# Altium PCB crowbar.PcbDoc
Units mil, origin at the board's own origin, x right, y up, seen from the top; angles counter-clockwise.
Board outline 2125.98 x 1417.32 mil, 2 copper layers (Top Layer, Bottom Layer); 13 components, 7 nets, 25 pads, 0 vias.
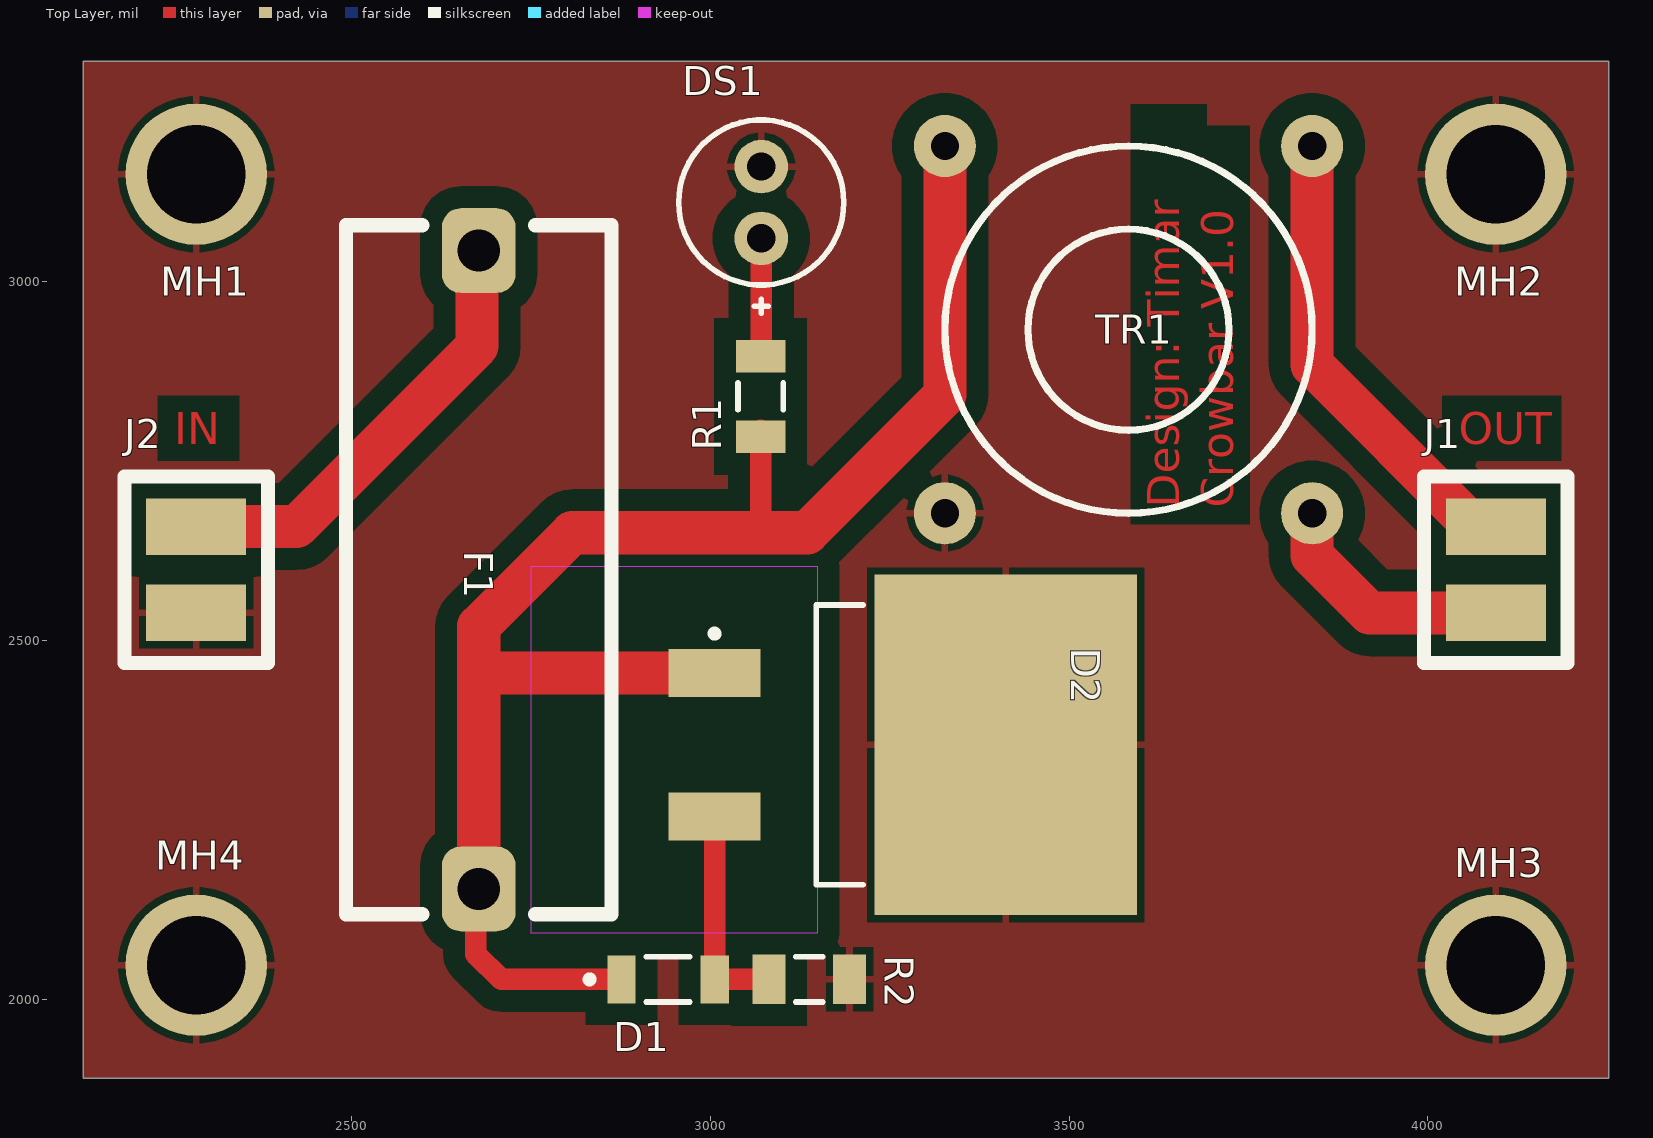
[diagram p0: Top Layer view]
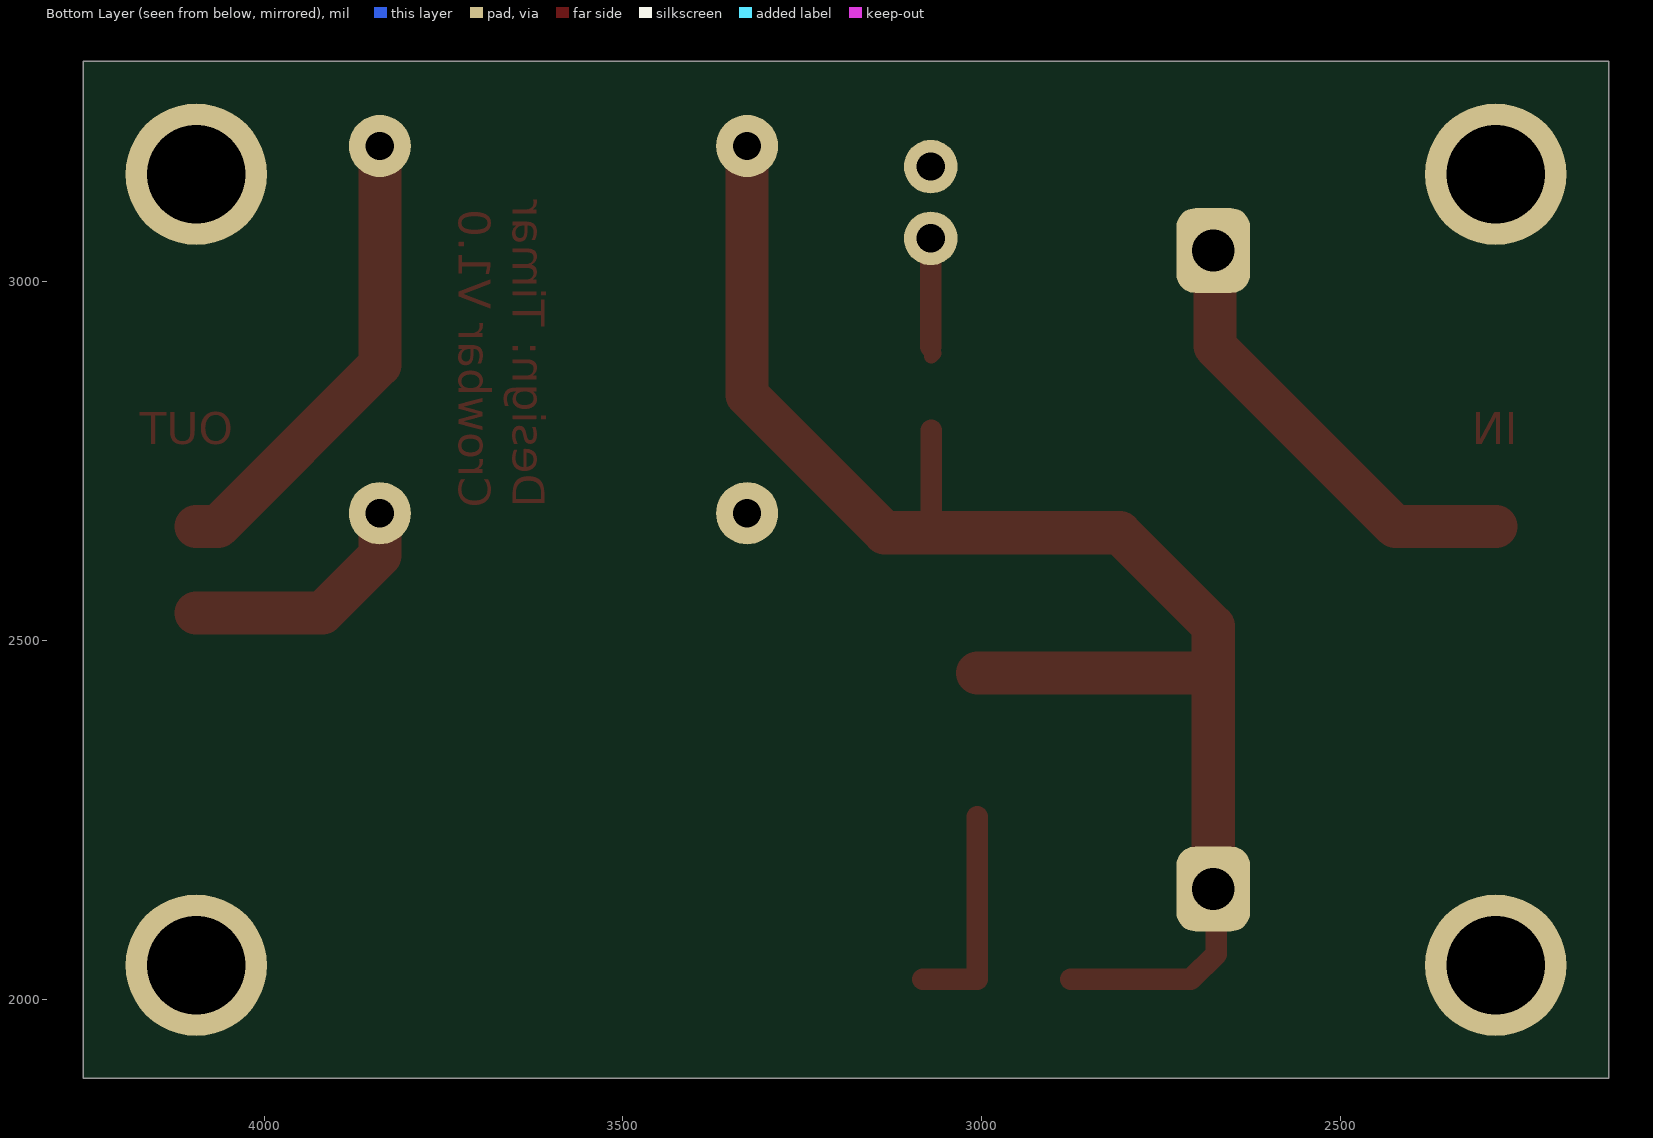
[diagram p1: Bottom Layer view, seen from below]

## Layer stack, top to bottom
Top Solder: solder mask 0.4, Solder Resist, Dk 3.5
Top Layer: signal copper 1.4
Dielectric 1: dielectric 12.6, FR-4, Dk 4.8
Bottom Layer: signal copper 1.4
Bottom Solder: solder mask 0.4, Solder Resist, Dk 3.5

## Board outline
2125.98,1889.76 4251.97,1889.76 4251.97,3307.09 2125.98,3307.09

## Design rules (kind name [scope] priority, off if disabled: settings)
Clearance [All] p1: gap=10 ignorepadtopadclearanceinfootprint=FALSE except(0: Arc-Hole Track-Hole SMDPad-Hole THPad-Hole Via-Hole Fill-Hole Poly-Hole Region-Hole Text-Hole; 30: Arc-Fill Arc-Poly Arc-Region Track-Fill Track-Poly Track-Region SMDPad-Fill SMDPad-Poly SMDPad-Region THPad-Fill THPad-Poly THPad-Region Via-Fill Via-Poly Via-Region Fill-Fill Fill-Poly Fill-Region Poly-Poly Poly-Region Region-Region)
PolygonConnect [All] p1: connectstyle=Relief reliefconductorwidth=10 reliefentries=4 polygonreliefangle="90 Angle" airgapwidth=10
RoutingVias [All] p1: holewidth=28 width=50 viastyle="Through Hole" minholewidth=28 minwidth=50 maxholewidth=28 maxwidth=50
SolderMaskExpansion [All] p1: expansion=4 istentingtop=FALSE
Width [All] p1: maxlimit=60 minlimit=20 preferedwidth=20 minimp=50.000000 maximp=50.000000 favimp=50.000000
30 further rules are at their usual default settings.

## Components (designator, comment, footprint, x,y, rotation, side; value= is the part's Value field where it differs from the comment)
D1 "BZV55-C15,115" FP-SOD80C-MFG 2940.94,2027.56 r0 top
D2 "BT137-800E" DPAK254P1525X460-3N 3267.72,2354.33 r0 top
DS1 "HLMP-4740" AVAG-HLMP-4740 3070.87,3110.24 r90 top
F1 "4A FAST" FUSE_SOCKET_PTF/78 2677.17,2598.43 r270 top
J1 "PWR_OUT" SOLDER_PAD_1L_2P 4094.49,2598.43 r180 top
J2 "PWR_IN" SOLDER_PAD_1L_2P 2283.46,2598.43 r180 top
MH1 "MH_3.5mm" MOUNTING_HOLE_GROUNDED 2283.46,3149.61 r0 top
MH2 "MH_3.5mm" MOUNTING_HOLE_GROUNDED 4094.49,3149.61 r0 top
MH3 "MH_3.5mm" MOUNTING_HOLE_GROUNDED 4094.49,2047.24 r0 top
MH4 "MH_3.5mm" MOUNTING_HOLE_GROUNDED 2283.46,2047.24 r0 top
R1 "Resistor" FP-CRCW1206-e3-IPC_B 3070,2840 r90 top
R2 "Resistor" FP-CRCW1206-e3-IPC_B 3137.8,2027.56 r0 top
TR1 "T38 4:4" TRANSFORMER_TOROID_FLAT 3582.68,2933.07 r90 top

## Footprints (in the part's own frame and the unit in brackets; to place one, negate y for a bottom-side part, rotate by r counter-clockwise, add the part's x,y. Pads: shape width x height; smd on the part's side, far side on the other; paste and mask are expansions set on the pad)
AVAG-HLMP-4740 [mm] "THD, 2-Leads, Dia 5.845mm, Pitch 2.54mm"
  round 1.9 hole 1: 1(-1.27,0) 2(1.27,0)
  silkscreen extent -3.92,-2.92 2.92,2.92
DPAK254P1525X460-3N [mm] "D2-PAK, 3-Pads, Body 7,45x8,31mm (max), IPC Medium Density"
  rect 3.25x1.7 smd: G(-6.65,-2.54) T1(-6.65,2.54)
  rect 9.3x12.05 smd: T2(3.65,0)
  silkscreen extent -6.77,-4.95 -1.4,4.95, body extent -6.9,-5.75 8.35,5.75, height 4.6
FP-CRCW1206-e3-IPC_B [mil]
  rect 45.51x69.22 smd paste+0 mask+0: 1(-56.14,0) 2(56.14,0)
  silkscreen extent -19,-31 19,31, body extent -89,-44 89,44, height 10
FP-SOD80C-MFG [mm]
  rect 1x1.7 smd paste-1000 mask+0: 1(-1.65,0) 2(1.65,0)
  silkscreen extent -2.9,-0.8 0.77,0.8, body extent -2.27,-1.12 2.27,1.12, height 0.25
FUSE_SOCKET_PTF/78 [mm] "-5x20mm / -"
  rrect50% 3x2.6 hole 1.5: 1(-11.3,0) 2(11.3,0)
  silkscreen extent -12.2,-4.7 12.2,4.7
MOUNTING_HOLE_GROUNDED [mm]
  round 5 hole 3.5: 1(0,0)
SOLDER_PAD_1L_2P [mm]
  rect 3.54x2 smd: 1(0,1.524) 2(0,-1.524)
  silkscreen extent -2.54,-3.3 2.54,3.3
TRANSFORMER_TOROID_FLAT [mm] "EPCOS 12.7x7.5x5"
  round 2.2 hole 1: P1(-6.5,6.5) P2(-6.5,-6.5) S1(6.5,6.5) S2(6.5,-6.5)
  silkscreen extent -6.5,-6.5 6.5,6.5

## Part data
D1: library part CMP-14400-000031-1, "DIODE ZENER 15V 500MW LLDS", RoHS Compliant=Yes
D2: library part Triac
DS1: library part CMP-2000-06413-1, "T-1 3/4 (5 mm) Low Current LED Lamp, Green, 1.9 V, -20 to 100 degC, 2-Pin THD, RoHS, Bulk", Color=Green, Dominant Wavelength/Color Temperature=569nm, Manufacturer=AvagoTechnologies, Package=2T-13/4, Package Description="2-Pin Through Hole Device, Dia 5.845 mm, Pitch 2.54 mm", Category=LEDs, Datasheet URL=http://docs.avagotech.com/docs/AV02-1557EN, Datasheet Version=07/2014, Intensity=2.3mcd, Lens Appearance=ColoredDiffused, Lens Shape Type=Circular, Manufacturer URL=http://www.avagotech.com/, Mounting=ThroughHole, Mounting Orientation=TopMount, Mounting Technology=ThroughHole, Number of LEDs=1, Package Reference=HLMP-4740, Packaging=Bulk, Peak Wavelength=565nm, Pin Count=2, Rad Hard=No, Type=Uni-Color, Viewing Angle=50°
F1: library part FUSE
J1 J2: library part SOLDER_PAD_1_2P
MH1 MH2 MH3 MH4: library part MOUNTING_HOLE_3.5mm_1, "3.5mm grounded mounting hole"
R1: "EU symbol", Resistance=2k2
R2: "EU symbol", Resistance=100k
TR1: library part Transformer, "1 Primer; 1 Seconder"

## Nets (pads, with @x,y where several pads share a name; then routed paths per layer and width w, separated by ;. In a path a pad name is that pad's centre, name@x,y a point inside that pad or via, vN(x,y) a via of type N, cw(c..) or ccw(c..) an arc to the next point about the centre after c; other vN are vias at no path point)
GND: D2.T2 DS1.2 J2.1 MH1.1 MH2.1 MH3.1 MH4.1 R2.2 TR1.P1
NetD1_1: D1.1 D2.T1 F1.2 R1.1 TR1.S1 | length 2278.9
  Top Layer w30: F1.2@2673.23,2149.61 2673.23,2062.71 2708.38,2027.56 D1.1 ; 3070,2650 R1.1@3070,2793.03
  Top Layer w60: F1.2@2673.23,2149.61 F1.2 2677.17,2456.69 ; D2.T1 2679.53,2454.33 2677.17,2456.69 ; TR1.S1 3326.77,2841.77 3135,2650 3070,2650 2807.48,2650 2677.17,2519.69 2677.17,2456.69
NetD1_2: D1.2 D2.G R2.1 | length 302.5
  Top Layer w30: D2.G D1.2 R2.1
NetDS1_1: DS1.1 R1.2 | length 156.6
  Top Layer w20: R1.2@3065.87,2900.28 R1.2
  Top Layer w30: R1.2@3070.87,2909.46 DS1.1
NetF1_1: F1.1 J2.2 | length 629.9
  Top Layer w60: J2.2 2423.43,2658.43 2675,2910 2675,3041.14 F1.1
NetJ1_1: J1.1 TR1.P2 | length 348
  Top Layer w60: TR1.P2 3838.58,2618.11 3918.27,2538.43 J1.1
NetJ1_2: J1.2 TR1.S2 | length 654.3
  Top Layer w60: TR1.S2 3838.58,2884.02 4064.17,2658.43 J1.2

## Polygon pours and split planes (outlines as drawn)
GND on Top Layer "GND_L01_P000" (solid, remove dead copper, pour order 0): 2125.98,3307.09 4251.97,3307.09 4251.97,1889.76 2125.98,1889.76

## Keep-outs
Top Layer:
  rectangle: 2749.61,2092.36 3149.61,2602.36

## Other copper
Top Layer:
  text "IN" at 2253,2773 h45
  text "OUT" at 4043,2773 h45
  text "Design: Timar" at 3653.5,2684.5 h45 r90
  text "Crowbar V1.0" at 3728.5,2684.5 h45 r90